# Altium PCB PCB1.PcbDoc
Units mm, origin at the board's own origin, x right, y up, seen from the top; angles counter-clockwise.
Board outline 84.2 x 53.9 mm, 2 copper layers (Top Layer, Bottom Layer); 6 components, 11 nets, 55 pads, 4 vias.
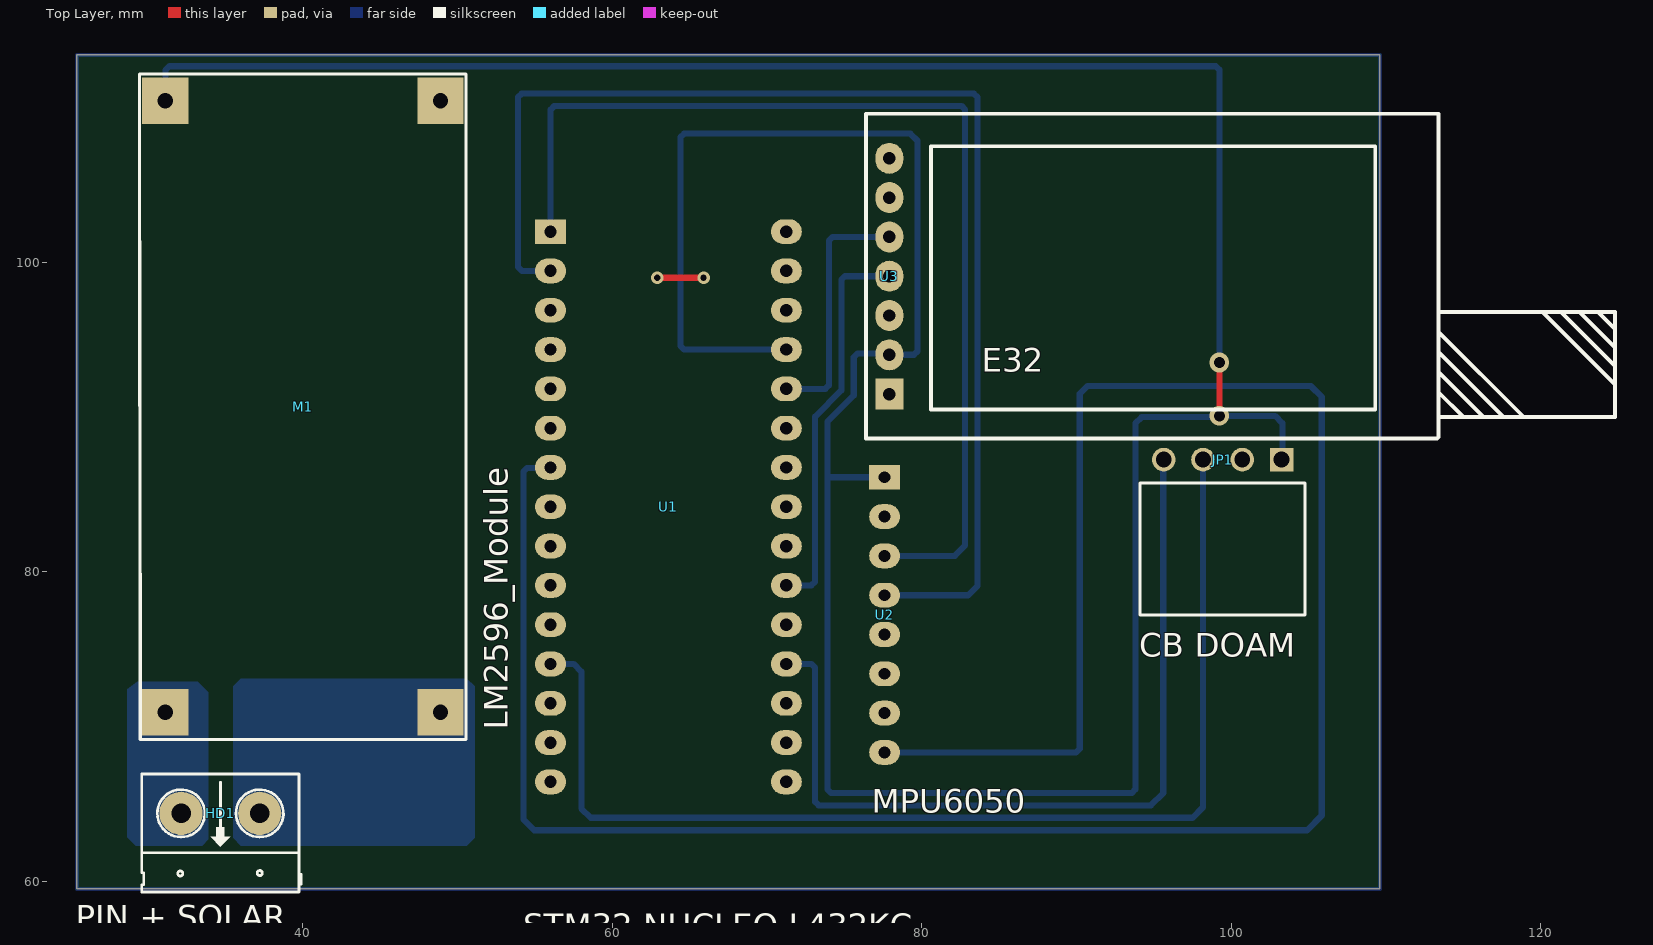
[diagram p0: Top Layer view]
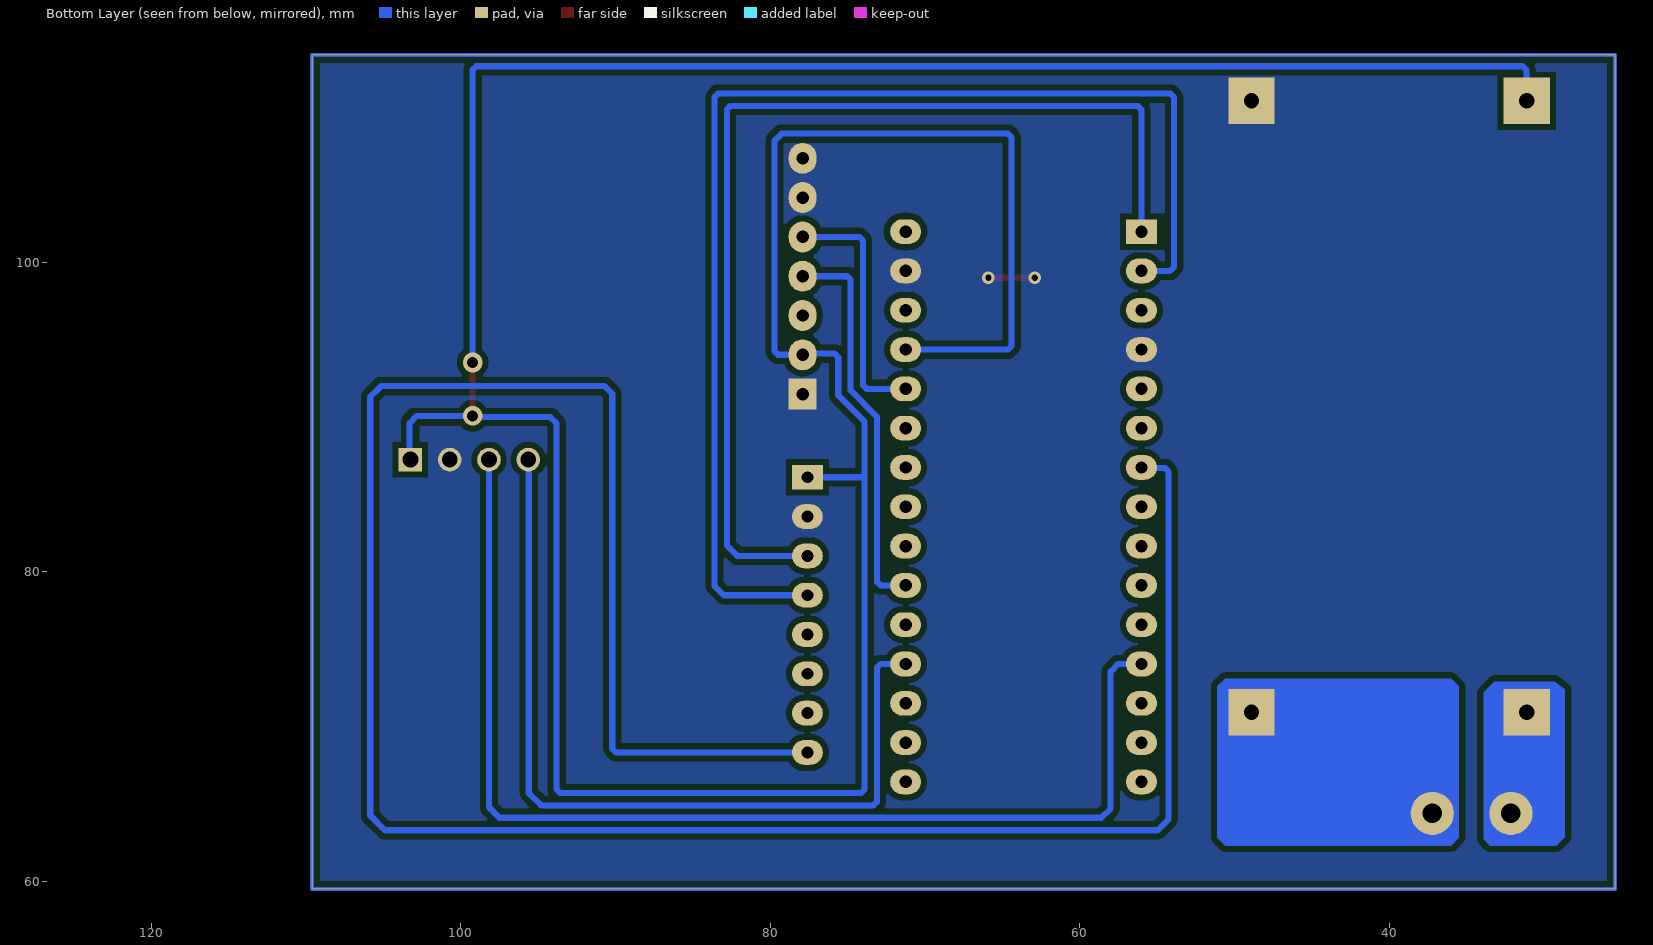
[diagram p1: Bottom Layer view, seen from below]
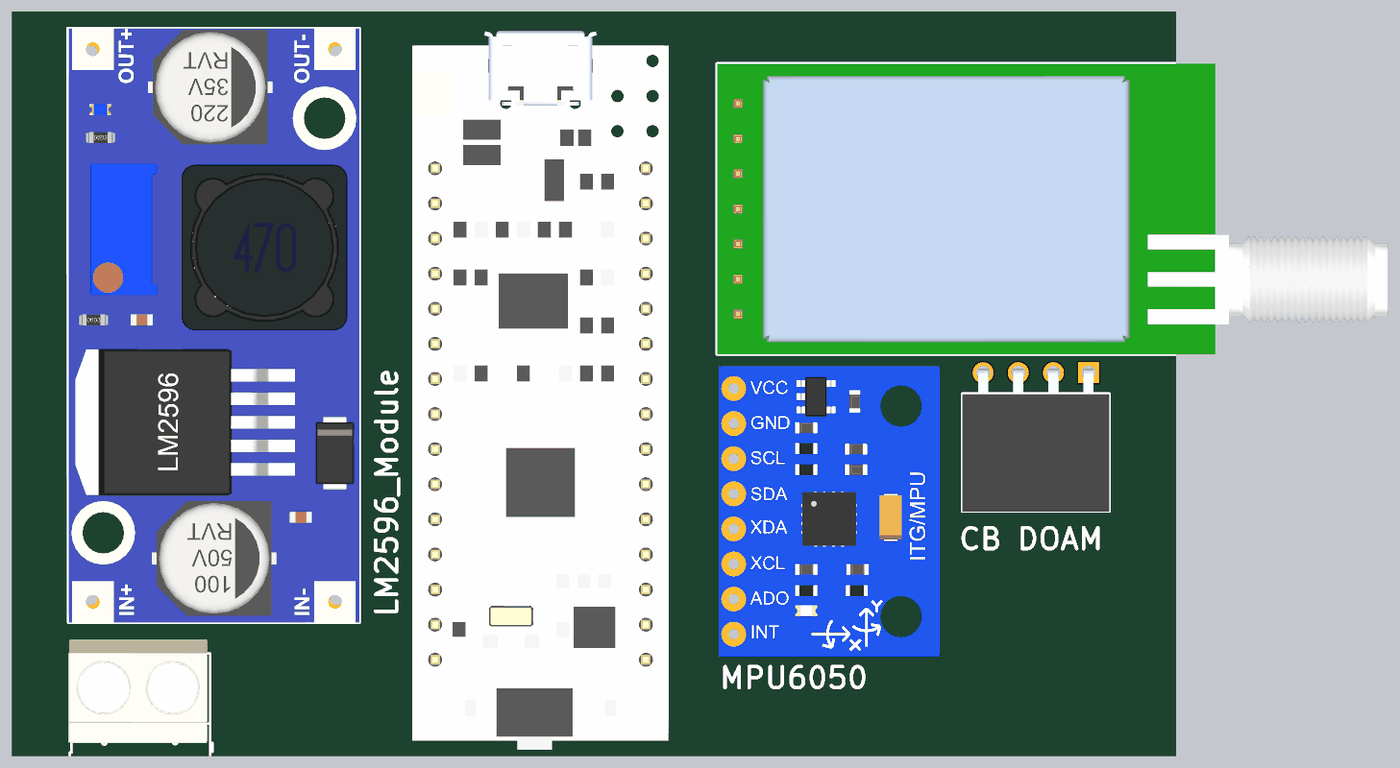
[diagram p2: 3D render of the assembled board from above, using the file's embedded part models]

## Layer stack, top to bottom
Top Solder: solder mask 0.0102, Solder Resist, Dk 3.5
Top Layer: signal copper 0.0356
Dielectric 1: dielectric 0.32, FR-4, Dk 4.8
Bottom Layer: signal copper 0.0356
Bottom Solder: solder mask 0.0102, Solder Resist, Dk 3.5

## Board outline
25.4,59.5 109.6,59.5 109.6,113.4 25.4,113.4

## Design rules (kind name [scope] priority, off if disabled: settings)
Clearance [All] p1: gap=0.4 ignorepadtopadclearanceinfootprint=FALSE
PolygonConnect [All] p1: connectstyle=Direct reliefconductorwidth=0.254 reliefentries=4 polygonreliefangle="90 Angle" airgapwidth=0.254
RoomDefinition Sheet1 [InComponentClass('Sheet1')] p1: confinementstyle=ConfineIn formatcopy=TRUE lockcomponents=FALSE outline 0,0 50.8,0 50.8,25.4 0,25.4
RoutingVias [All] p1: holewidth=0.711 width=1.27 viastyle="Through Hole" minholewidth=0.711 minwidth=1.27 maxholewidth=0.711 maxwidth=1.27
SolderMaskExpansion [All] p1: expansion=0.102 istentingtop=FALSE
Width [All] p1: maxlimit=0.8 minlimit=0.4 preferedwidth=0.6
30 further rules are at their usual default settings.

## Components (designator, comment, footprint, x,y, rotation, side; value= is the part's Value field where it differs from the comment)
HD1 "PIN + SOLAR" HED2 37.211,64.389 r180 top value="Header 2"
JP1 "CB DOAM" "JP 1x4 CC" 99.441,87.249 r180 top
M1 "LM2596_Module" LM2596S_Module 40.005,90.678 r90 top
U1 "STM32 NUCLEO L432KC" "STM32 NUCLEO L432KC" 63.627,89.281 r0 top
U2 "MPU6050" MPU6050 77.597,77.216 r0 top
U3 "E32" E32 77.9,99.1 r90 top

## Footprints (in the part's own frame and the unit in brackets; to place one, negate y for a bottom-side part, rotate by r counter-clockwise, add the part's x,y. Pads: shape width x height; smd on the part's side, far side on the other; paste and mask are expansions set on the pad)
E32 [mm]
  rect 2x1.8 hole 0.8: 1(-7.62,0)
  oval 2x1.8 hole 0.8: 2(-5.08,0) 3(-2.54,0) 4(0,0) 5(2.54,0) 6(5.08,0) 7(7.62,0)
  silkscreen extent -10.5,-46.9 10.5,1.5, body extent -10.5,-47 10.5,1.5, height 7.8
HED2 [mil] "Header 2, 2 pin, hight 300mil, Pin to Pin 200, Colour Green"
  round 110 hole 50: 1(0,0) 2(200,0)
  silkscreen extent -106,-100 300,200, body extent -92,-140 302,155, height 394
"JP 1x4 CC" [mm]
  rect 1.52x1.52 hole 1.02: 1(-3.81,0)
  round 1.52 hole 1.02: 2(-1.27,0) 3(1.27,0) 4(3.81,0)
  silkscreen extent -5.33,1.52 5.33,10.03, body extent -5.33,-0.25 5.33,10.05, height 2.51
LM2596S_Module [mm]
  rect 3x3 hole 1: 1(-19.75,8.89) 2(-19.75,-8.89) 3(19.75,-8.89) 4(19.75,8.89)
  silkscreen extent -21.51,-10.54 21.49,10.57, body extent -21.51,-10.51 21.49,10.49, height 13.22
MPU6050 [mm]
  rect 2x1.6 hole 0.762: 1(0,8.89)
  oval 2x1.6 hole 0.762: 2(0,6.35) 3(0,3.81) 4(0,1.27) 5(0,-1.27) 6(0,-3.81) 7(0,-6.35) 8(0,-8.89)
  body extent -1.1,-10.5 14.9,10.5, height 3.81
"STM32 NUCLEO L432KC" [mm]
  rect 2x1.6 hole 0.8: 1(-7.62,12.7)
  oval 2x1.6 hole 0.8: 2(-7.62,10.16) 3(-7.62,7.62) 4(-7.62,5.08) 5(-7.62,2.54) 6(-7.62,0) 7(-7.62,-2.54) 8(-7.62,-5.08) 9(-7.62,-7.62) 10(-7.62,-10.16) 11(-7.62,-12.7) 12(-7.62,-15.24) 13(-7.62,-17.78) 14(-7.62,-20.32) 15(-7.62,-22.86) 16(7.62,-22.86) 17(7.62,-20.32) 18(7.62,-17.78) 19(7.62,-15.24) 20(7.62,-12.7) 21(7.62,-10.16) 22(7.62,-7.62) 23(7.62,-5.08) 24(7.62,-2.54) 25(7.62,0) 26(7.62,2.54) 27(7.62,5.08) 28(7.62,7.62) 29(7.62,10.16) 30(7.62,12.7)
  body extent -9.27,-29.32 9.27,22.68, height 8.51

## Part data
HD1: library part Hed2, "Header 2 (Green)"
JP1: library part "JP 1x4 2.54 Cai Cong", "Cắm", Chung_Loai=Cắm, Don_Vi=Con, Ma_Hang=MH001265, Ten_Linh_Kien="Jump Đơn Cái 2.54MM 1x40P Cong"
M1: "Module"
U3: "Lora"

## Via types
v1: diameter 0.8, hole 0.4, Top Layer to Bottom Layer, 2 vias
v2: diameter 1.27, hole 0.711, Top Layer to Bottom Layer, 2 vias

## Nets (pads, with @x,y where several pads share a name; then routed paths per layer and width w, separated by ;. In a path a pad name is that pad's centre, name@x,y a point inside that pad or via, vN(x,y) a via of type N, cw(c..) or ccw(c..) an arc to the next point about the centre after c; other vN are vias at no path point)
+5: JP1.1 M1.4 U1.27 U2.1 U3.2 | length 234.9
  Top Layer w0.4: v2(99.227,90.073) v2(99.227,93.527)
  Bottom Layer w0.4: M1.4 31.115,112.415 31.373,112.673 98.993,112.673 99.227,112.439 v2(99.227,93.527) ; U1.27 64.634,94.361 64.4,94.595 64.4,108.086 64.634,108.32 79.266,108.32 79.72,107.866 79.72,94.254 79.486,94.02 U3.2 77.82,94.1 75.834,94.1 75.6,93.866 75.6,92.3 75.6,91.393 73.9,89.693 73.9,86.106 ; U2.1 73.9,86.106 ; v2@99.227,90 94.2,90 93.8,89.6 93.8,65.934 93.566,65.7 74.134,65.7 73.9,65.934 73.9,86.106 ; v2(99.227,90.073) 102.827,90.073 103.3,89.6 JP1.1@103.3,87.298
A0: JP1.4 U1.19 | length 55.1
  Bottom Layer w0.4: U1.19 72.866,74.041 73.1,73.807 73.1,65.134 73.334,64.9 94.8,64.9 95.6,65.7 95.6,87.218 JP1.4
A2: U1.21 U3.4 | length 25.4
  Bottom Layer w0.4: U1.21 72.866,79.121 73.1,79.355 73.1,90.024 74.8,91.724 74.8,98.866 75.034,99.1 U3.4
A7: U1.26 U3.5 | length 16.2
  Bottom Layer w0.4: U1.26 73.766,91.821 74,92.055 74,101.406 74.234,101.64 U3.5
D0: U1.2 U2.4 | length 80.9
  Bottom Layer w0.4: U1.2 54.159,99.441 53.9,99.7 53.9,110.666 54.134,110.9 83.366,110.9 83.6,110.666 83.6,79.1 82.986,78.486 U2.4
D1: U1.1 U2.3 | length 68.5
  Bottom Layer w0.4: U1.1 56.007,109.866 56.241,110.1 82.566,110.1 82.8,109.866 82.8,81.7 82.126,81.026 U2.3
D4: U1.7 U2.8 | length 155.5
  Bottom Layer w0.4: U1.7@56.057,86.7 54.484,86.7 54.25,86.466 54.25,64 54.95,63.3 104.9,63.3 105.85,64.25 105.85,91.299 105.15,91.999 90.699,91.999 90.2,91.5 90.2,68.56 89.966,68.326 U2.8
D9: JP1.3 U1.12 | length 74.2
  Bottom Layer w0.4: U1.12 57.5,74.041 58,73.541 58,64.7 58.6,64.1 97.5,64.1 98.171,64.771 JP1.3
GND: JP1.2 M1.3 U1.4 U1.29 U2.2 U3.1 U3.6 U3.7 | length 3
  Top Layer w0.4: v1(62.9,99) v1(65.9,99)
NetHD1_1: HD1.1 M1.2
NetHD1_2: HD1.2 M1.1
pads on no net: U1.3 U1.5 U1.6 U1.8 U1.9 U1.10 U1.11 U1.13 U1.14 U1.15 U1.16 U1.17 U1.18 U1.20 U1.22 U1.23 U1.24 U1.25 U1.28 U1.30 U2.5 U2.6 U2.7 U3.3
copper on no net: | length 276.3
  Bottom Layer w0.254: 103.251,87.249 103.3,87.298 ; 25.4,59.5 25.4,113.4 25.5,113.4 28.6,113.4 109.6,113.4 109.6,59.5 25.4,59.5

## Polygon pours and split planes (outlines as drawn)
GND on Bottom Layer "NONET_L-01_P-001" (solid, pour order 0): 25.4,59.5 109.6,59.5 109.6,113.4 25.4,113.4

## Other copper
Bottom Layer:
  region net NetHD1_1: 35.5,62.8 36,62.3 50.6,62.3 51.1,62.8 51.1,72.6 50.6,73.1 36,73.1 35.5,72.6
  region net NetHD1_2: 28.649,72.4 29.3,72.9 33.2,72.9 33.9,72.2 33.9,62.7 33.5,62.3 29.2,62.3 28.649,62.851